# Altium PCB lock_in.PcbDoc
Units mil, origin at the board's own origin, x right, y up, seen from the top; angles counter-clockwise.
Board outline 3533 x 1997 mil, 2 copper layers (Top Layer, Bottom Layer); 71 components, 52 nets, 243 pads, 188 vias.
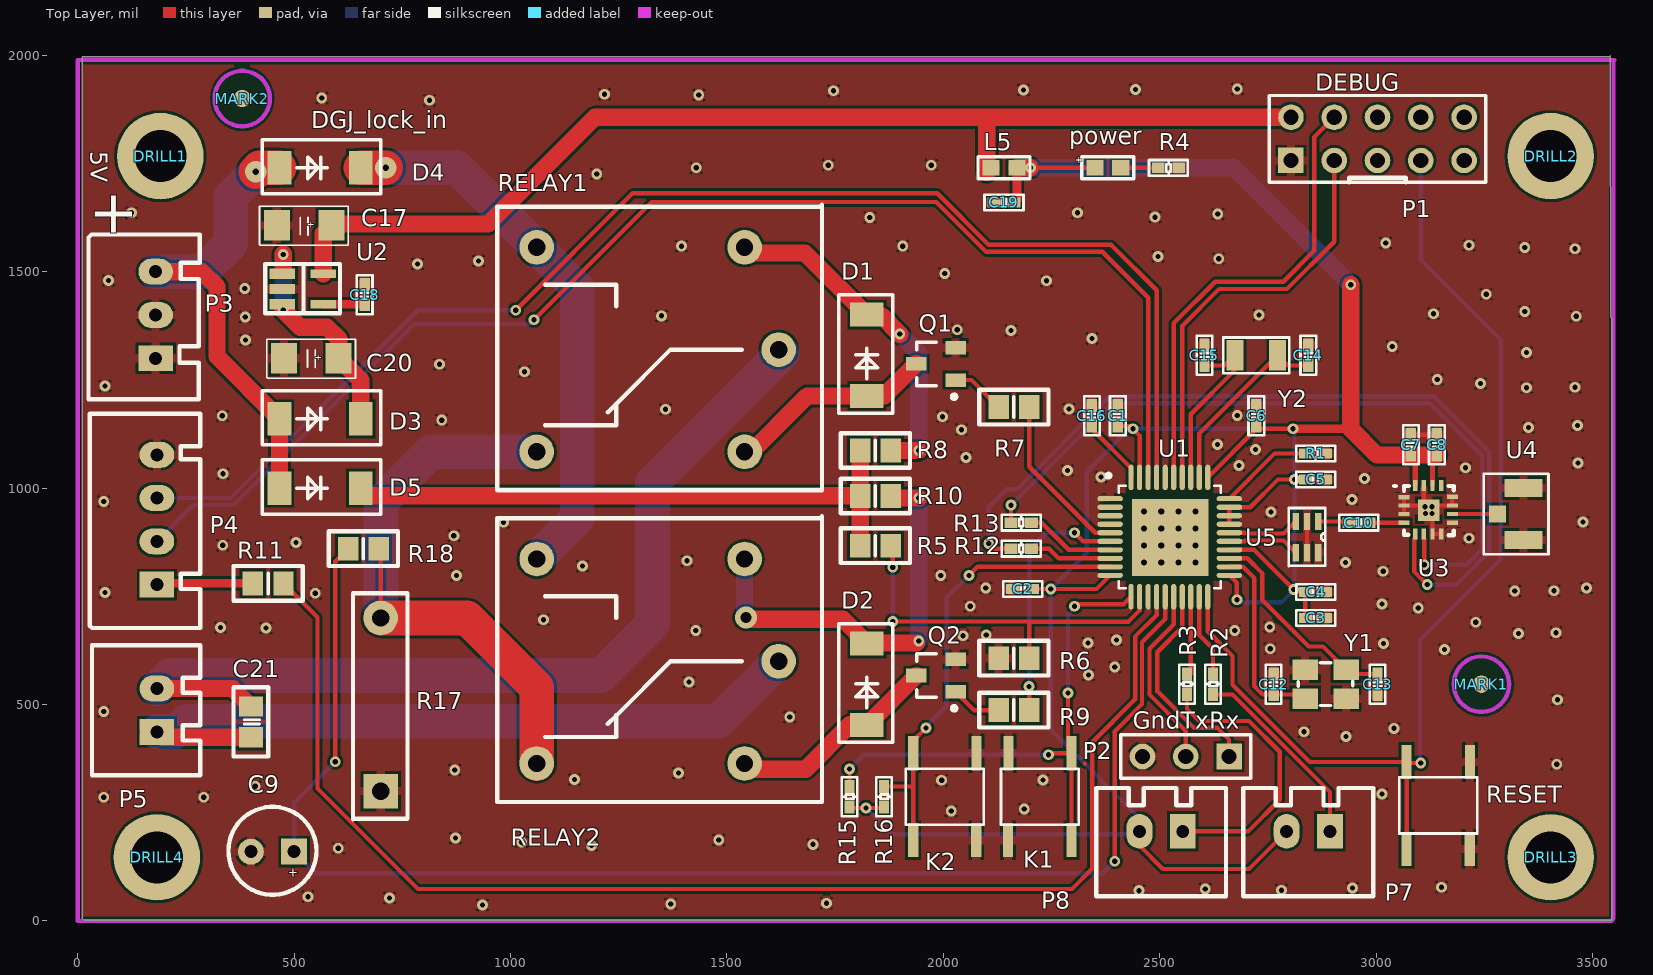
[diagram p0: Top Layer view]
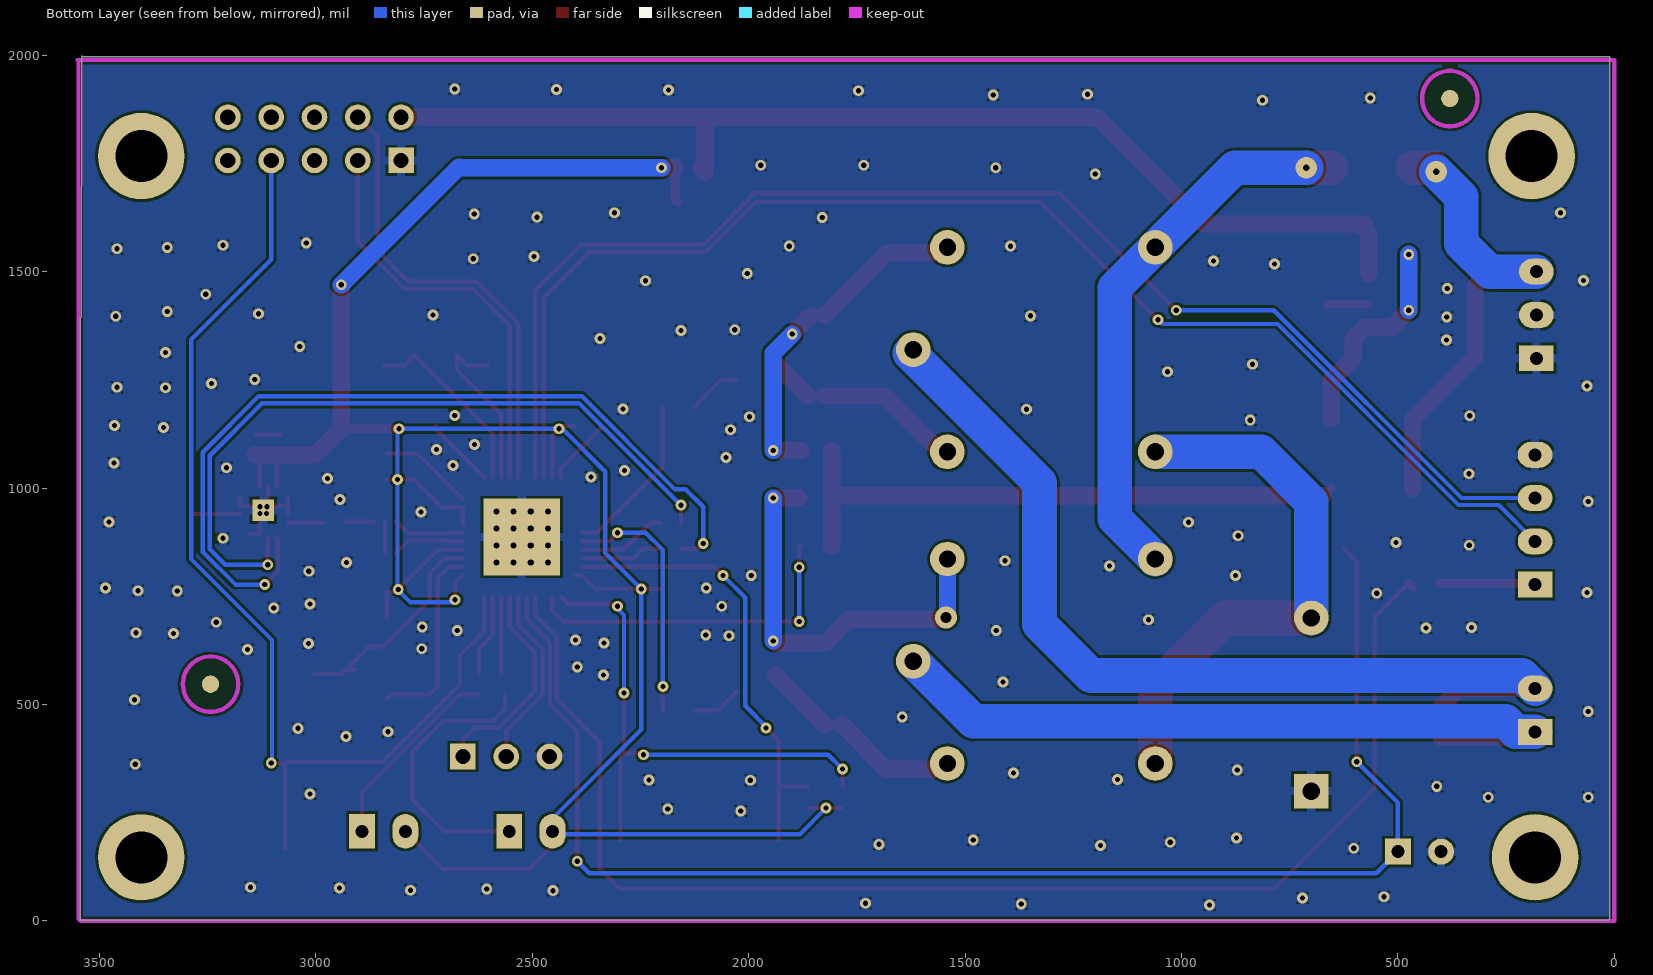
[diagram p1: Bottom Layer view, seen from below]

## Layer stack, top to bottom
Top Layer: signal copper 1.4
Dielectric: dielectric 12.6, FR-4, Dk 4.8
Bottom Layer: signal copper 1.4

## Board outline
3542,1395 3544,1393 3544,2 14,2 11,5 11,1997 3539,1997 3541,1999

## Design rules (kind name [scope] priority, off if disabled: settings)
Clearance [All] p1: gap=6
DiffPairsRouting [All] p1: maxlimit=20 minlimit=6 mostfreqgap=6 maxuncoupledlength=500
MatchedLengths DiffPair_MatchedLengths [InDifferentialPair ('RF1')] p1: tolerance=1000 checknetsindiffpair=TRUE checkdiffpairvsdiffpair=TRUE checkothers=TRUE
PlaneConnect [All] p1: planeconnectstyle=Relief reliefexpansion=20 reliefentries=4 reliefconductorwidth=20 reliefairgap=20
PolygonConnect [All] p1: connectstyle=Relief reliefconductorwidth=20 reliefentries=4 polygonreliefangle="90 Angle"
RoutingVias [All] p1: holewidth=12 width=25 viastyle="Through Hole" minholewidth=12 minwidth=25 maxholewidth=25 maxwidth=50
SilkscreenOverComponentPads [All] p1: minsilkscreentomaskgap=10
SolderMaskExpansion [All] p1: expansion=4
Width DiffPair_Width [InDifferentialPair('RF1')] p1: maxlimit=10 minlimit=10 preferedwidth=10
Width [All] p2: maxlimit=100 minlimit=10 preferedwidth=10
25 further rules are at their usual default settings.

## Classes and differential pairs
component class U_driver: C9 C21 D1 D2 D4 D5 DRILL1 DRILL2 DRILL3 DRILL4 MARK1 MARK2 P3 P4 P5 Q1 Q2 R7 R8 R9 R10 R11 R17 R18 RELAY1 RELAY2
component class U_lock_in: C1 C2 C3 C4 C5 C6 C7 C8 C10 C12 C13 C14 C15 C16 C17 C18 C19 C20 D3 K1 K2 L5 P1 P2 P7 P8 power R1 R2 R3 R4 R5 R6 R12 R13 R15 R16 RESET U1 U2 U3 U4 U5 Y1 Y2
differential pair RF1: +RF1_P -RF1_N

## Components (designator, comment, footprint, x,y, rotation, side; value= is the part's Value field where it differs from the comment)
C1 "0.1uF,0402" C0402 2403,1167 r270 top
C2 "0.1uF,0402" C0402 2183,767 r0 top
C3 "0.1uF,0402" C0402 2860,700 r0 top
C4 "0.1uF,0402" C0402 2860,760 r180 top
C5 "0.1uF,0402" C0402 2860,1020 r180 top
C6 "1uF,0402" C0402 2723,1167 r270 top
C7 "104,0402" C0402 3080,1100 r270 top
C8 "104,0402" C0402 3140,1100 r90 top
C9 "4.7uF" CDIP2 500,160 r180 top
C10 "2.2pf,0402" C0402 2960,920 r0 top
C12 "27pF,0402" C0402 2763,547 r270 top
C13 "27pF,0402" C0402 3003,547 r90 top
C14 "15pF,0402" C0402 2843,1307 r90 top
C15 "15pF,0402" C0402 2603,1307 r90 top
C16 "0.1uF,0402" C0402 2343,1167 r270 top
C17 "47uF" 3216 523,1607 r180 top
C18 "0.1uF,0402" C0402 663,1447 r270 top
C19 "0.1uF,0402" C0402 2140,1660 r0 top
C20 "47uF" 3216 540,1300 r180 top
C21 "0.1uF,0805" C0805 400,460 r90 top
D1 "M1" DO214AC 1823,1307 r90 top
D2 "M1" DO214AC 1823,547 r90 top
D3 "M7" DO214AC 560,1160 r0 top
D4 "M7" DO214AC 560,1740 r0 top
D5 "M7" DO214AC 560,1000 r0 top
DRILL1 "DRILL" DRILL_3MM 191,1767 r90 top
DRILL2 "DRILL" DRILL_3MM 3403,1767 r90 top
DRILL3 "DRILL" DRILL_3MM 3403,147 r90 top
DRILL4 "DRILL" DRILL_3MM 183,147 r90 top
K1 "KEY_SMT_4PIN" KEY-SMT 2223,287 r270 top
K2 "KEY_SMT_4PIN" KEY-SMT 2003,287 r90 top
L5 "1uH,0603" L0603 2140,1740 r0 top
MARK1 "MARK POINT" MARK_POINT 3243,547 r90 top
MARK2 "MARK POINT" MARK_POINT 380,1900 r90 top
P1 "DEBUG" HDR2X5 3003,1807 r90 top
P2 "GndTxRx" HDR1X3 2660,380 r180 top
P3 "5V" HDR3X1 180,1400 r90 top
P4 "itr9608" HDR4X1 183,927 r90 top
P5 "MOTOR" HDR2X1 183,487 r90 top
P7 "Header2X1" HDR2X1 2843,207 r180 top
P8 "Header2X1" HDR2X1 2503,207 r180 top
power "0603_SMT" LED0603 2380,1740 r0 top
Q1 "S8050,SOT-23" SOT23 1983,1287 r90 top
Q2 "S8050,SOT-23" SOT23 1983,567 r90 top
R1 "56k,0402" R0402 2860,1080 r180 top
R2 "1k,0402" R0402 2623,547 r90 top
R3 "1k,0402" R0402 2563,547 r90 top
R4 "1k,0402" R0402 2520,1740 r0 top
R5 "15k,0805" R0805 1843,867 r0 top
R6 "10k,0805" R0805 2163,607 r180 top
R7 "2k,0808" R0805 2163,1187 r0 top
R8 "220,0805" R0805 1843,1087 r180 top
R9 "2k,0808" R0805 2163,487 r180 top
R10 "220,0805" R0805 1843,982 r180 top
R11 "220,,0805" R0805 440,780 r0 top
R12 "1k,0402" R0402 2180,860 r180 top
R13 "1k,0402" R0402 2180,920 r180 top
R15 "22k,0402" R0402 1783,287 r90 top
R16 "22k,0402" R0402 1863,287 r90 top
R17 "10mm*0.02" Ri 700,500 r270 top
R18 "10k,0603" R0805 660,860 r180 top
RELAY1 "5V_RELAY" RELAY_5V_5PIN 1340,1320 r180 top
RELAY2 "5V_RELAY" RELAY_5V_5PIN 1340,600 r180 top
RESET "KEY_SMT_4PIN" KEY-SMT 3143,267 r90 top
U1 "CC2541F256" PQFP40 2523,887 r0 top
U2 "RT9193-33V" SOT-23-5 520,1460 r270 top
U3 "RFX2401C" QFN16 3120,950 r0 top
U4 "ipex" IPEX 3340,1000 r0 top
U5 "2450BM15A002" 2450BM15A002 2840,887 r270 top
Y1 "32.000MHz/SX-32" 1210 2883,547 r0 top
Y2 "32.768kHz" 1206 2723,1307 r0 top

## Footprints (in the part's own frame and the unit in brackets; to place one, negate y for a bottom-side part, rotate by r counter-clockwise, add the part's x,y. Pads: shape width x height; smd on the part's side, far side on the other; paste and mask are expansions set on the pad)
1206 [mm]
  rect 1x1.8 smd: 1(-1.25,0) 2(1.25,0)
  silkscreen extent -1.93,-1.07 1.93,1.04
1210 [mm]
  rect 1.5x1.2 smd: 1(-1.2,-0.85) 2(1.2,-0.85) 3(1.2,0.85) 4(-1.2,0.85)
  silkscreen extent -1.6,-1.25 1.6,1.25
2450BM15A002 [mil]
  rect 40x14 smd: 1(-36,26) 2(-36,0) 3(-36,-26) 4(36,-26) 5(36,0) 6(36,26)
  silkscreen extent -67,-42 67,42
3216 [mil]
  rect 60x70 smd: 1(-63,0) 2(63,0)
  silkscreen extent -102,-44 103,46
C0402 [mm]
  rect 0.75x0.6 smd: 1(-0.6,0) 2(0.6,0)
  silkscreen extent -1.14,-0.46 1.14,0.46
C0805 [mm]
  rect 1.2x1.4 smd: 1(-0.9,0) 2(0.9,0)
  silkscreen extent -2.03,-1.02 2.03,1.02
CDIP2 [mil]
  rect 60x60 hole 30: 1(0,0)
  round 60 hole 30: 2(100,0)
  silkscreen extent -52,-104 152,100
DO214AC [mil]
  rect 55x77 smd: 1(-94,0) 2(94,0)
  silkscreen extent -134,-60 140,65
DRILL_3MM [mil]
  round 200 hole 120: 1(0,0)
HDR1X3 [mm] "Connector; Header; 3 Position"
  rect 1.5x1.5 hole 0.9: 1(0,0)
  round 1.5 hole 0.9: 2(2.54,0) 3(5.08,0)
  silkscreen extent -1.27,-1.27 6.35,1.27
HDR2X1 [mil]
  rect 60x80 hole 30: 1(-50,0)
  oval 60x80 hole 30: 2(50,0)
  silkscreen extent -150,-100 150,150
HDR2X5 [mm]
  rect 1.5x1.5 hole 0.9: 1(-1.27,5.08)
  round 1.5 hole 0.9: 2(1.27,5.08) 3(-1.27,2.54) 4(1.27,2.54) 5(-1.27,0) 6(1.27,0) 7(-1.27,-2.54) 8(1.27,-2.54) 9(-1.27,-5.08) 10(1.27,-5.08)
  silkscreen extent -2.54,-6.35 2.54,6.35
HDR3X1 [mil]
  rect 60x80 hole 30: 1(-100,0)
  oval 60x80 hole 30: 2(0,0) 3(100,0)
  silkscreen extent -195,-102 186,155
HDR4X1 [mil]
  rect 60x80 hole 30: 1(-150,0)
  oval 60x80 hole 30: 2(-50,0) 3(50,0) 4(150,0)
  silkscreen extent -250,-100 245,155
IPEX [mil]
  rect 40x40 smd: 1(-60,-60)
  rect 88x42 smd: 2(0,-120) 3(0,0)
  silkscreen extent -92,-153 58,33
KEY-SMT [mm]
  rect 2x0.6 smd: 1(-2.55,-1.85) 1(2.55,-1.87) 2(-2.55,1.85) 2(2.55,1.85)
  silkscreen extent -1.65,-2.29 1.65,2.29
L0603 [mil]
  rect 40x35 smd: 1(-29.92,0) 2(29.92,0)
  silkscreen extent -60,-26 60,26
LED0603 [mil]
  rect 40x35 smd: 1(-29.92,0) 2(29.92,0)
  silkscreen extent -60,-26 60,26
MARK_POINT [mil]
  round 40 all layers, no hole paste+40 mask+40: 1(0,0)
  Keep-Out Layer circle w10: c0,0 r64.03
PQFP40 [mm]
  oval 1.5x0.3 smd paste+0 mask+0.051: 1(-3.5,2.25) 2(-3.5,1.75) 3(-3.5,1.25) 4(-3.5,0.75) 5(-3.5,0.25) 6(-3.5,-0.25) 7(-3.5,-0.75) 8(-3.5,-1.25) 9(-3.5,-1.75) 10(-3.5,-2.25) 21(3.5,-2.25) 22(3.5,-1.75) 23(3.5,-1.25) 24(3.5,-0.75) 25(3.5,-0.25) 26(3.5,0.25) 27(3.5,0.75) 28(3.5,1.25) 29(3.5,1.75) 30(3.5,2.25)
  oval 0.3x1.5 smd paste+0 mask+0.051: 11(-2.268,-3.5) 12(-1.768,-3.5) 13(-1.268,-3.5) 14(-0.768,-3.5) 15(-0.268,-3.5) 16(0.232,-3.5) 17(0.732,-3.5) 18(1.232,-3.5) 19(1.732,-3.5) 20(2.232,-3.5) 31(2.232,3.5) 32(1.732,3.5) 33(1.232,3.5) 34(0.732,3.5) 35(0.232,3.5) 36(-0.268,3.5) 37(-0.768,3.5) 38(-1.268,3.5) 39(-1.768,3.5) 40(-2.268,3.5)
  rect 0.762x0.762 hole 0.356 paste+0 mask+0: 41(-1.5,-1.5) 41(-1.5,-0.5) 41(-1.5,0.5) 41(-1.5,1.5) 41(-0.5,-1.5) 41(-0.5,-0.508) 41(-0.5,0.5) 41(-0.5,1.5) 41(0.516,-1.5) 41(0.516,-0.508) 41(0.516,0.5) 41(0.516,1.5) 41(1.5,-1.5) 41(1.5,-0.508) 41(1.5,0.5) 41(1.5,1.5)
  rect 4.5x4.5 smd paste+0 mask+0: 41(0.024,-0.024)
  rect 4.496x4.496 smd far side: 41(0.025,0)
  silkscreen extent -3.71,-3 3,3.71
QFN16 [mil]
  rect 26x10 smd: 1(-56,29) 2(-56,10) 3(-56,-10) 4(-56,-30) 9(56,-30) 10(56,-10) 11(56,10) 12(56,30)
  rect 10x26 smd: 5(-30,-56) 6(-10,-56) 7(10,-56) 8(30,-56) 13(30,56) 14(10,56) 15(-10,56) 16(-30,56)
  rect 50x50 all layers, no hole: 17(1,-1)
  silkscreen extent -78,-59 59,55
R0402 [mm]
  rect 0.75x0.6 smd: 1(-0.6,0) 2(0.6,0)
  silkscreen extent -1.14,-0.46 1.14,0.46
R0805 [mm] "Chip Resistor, Body 2.0x1.2mm, IPC Medium Density"
  rect 1.2x1.4 smd: 1(-0.9,0) 2(0.9,0)
  silkscreen extent -2.03,-1.02 2.03,1.02
RELAY_5V_5PIN [mil]
  round 80 hole 40: 1(-279.5,0) 2(279.5,236.2) 3(279.5,-236.2) 4(-200.7,-236.2) 5(-200.7,236.2)
  silkscreen extent -380,-335 371,325
Ri [mil] "res for detect i"
  round 80 hole 40: 1(-200,0)
  rect 80x80 hole 40: 2(200,0)
  silkscreen extent -257,-64 265,62
SOT23 [mm] "SOT-23; 3 Leads; Body 3.0 x 2.3 mm, inc. leads (LxW max)"
  rect 0.8x1.2 smd: 1(-0.95,-1.15) 2(0.95,-1.15) 3(0,1.15)
  silkscreen extent -2.05,-1.19 1.28,1.14
SOT-23-5 [mm]
  rect 0.6x1.5 smd: 1(-0.9,-1.2) 2(0,-1.2)
  rect 0.63x1.5 smd: 3(0.9,-1.2)
  rect 0.5x1.5 smd: 4(0.9,1.2) 5(-0.9,1.2)
  silkscreen extent -1.47,-2.21 1.43,2.18

## Part data
C1 C2 C3 C4 C5 C6 C7 C8 C10 C12 C13 C14 C15 C16 C18 C19 C21: library part CAP, "Capacitor"
C9: library part E_CAP, "electric capacitor"
C17 C20: library part E_CAP, "tantalum capacitor"
D1 D2 D3 D4 D5: library part DIODE, "diode"
K1 K2 RESET: library part KEY, "key"
L5: library part Inductor, "Inductor"
MARK1 MARK2: library part MARK_POINT
P1: library part "Header 5X2", "Header, 5-Pin, Dual row"
P2: library part "Header 3", "Header, 3-Pin"
P3: library part "Header 3X1", "Header 3X1,3-Pin"
P4: library part "Header 4X1", "ITR9608"
P5: library part "Header 2X1"
P7 P8: library part "Header 2X1", "Header,2-Pin"
power: library part LED, "led"
Q1: library part NPN, "transistor"
Q2: library part NPN
R1 R2 R3 R4 R5 R6 R7 R8 R9 R10 R11 R12 R13 R15 R16 R18: library part Res1, "Resistor"
R17: library part Ri
RELAY1 RELAY2: library part RELAY, "relay"
U1: library part CC254x, "TI cc2541F256"
U2: library part RT9193X, "voltage reg"
U4: library part IPEX
Y1: library part CRYSTAL_5, "SPXO"
Y2: library part DA740C, "crystal"

## Via types
v1: diameter 25, hole 12, Top Layer to Bottom Layer, 185 vias
v2: diameter 50, hole 15, Top Layer to Bottom Layer, 2 vias
v3: diameter 50, hole 25, Top Layer to Bottom Layer, 1 vias

## Nets (pads, with @x,y where several pads share a name; then routed paths per layer and width w, separated by ;. In a path a pad name is that pad's centre, name@x,y a point inside that pad or via, vN(x,y) a via of type N, cw(c..) or ccw(c..) an arc to the next point about the centre after c; other vN are vias at no path point)
DC: P1.3 U1.34 | length 969.6
  Top Layer w10: U1.34 2551.81,1374.82 2637,1460 2794,1460 2903,1569 P1.3
DD: P1.4 U1.35 | length 1077.8
  Top Layer w10: U1.35 2532.13,1381.13 2628,1477 2785,1477 2857,1549 2857,1811 P1.4
GND: C1.1 C2.1 C3.2 C4.1 C5.1 C6.1 C7.1 C8.2 C9.2 C12.1 C13.1 C14.2 C15.2 C16.1 C17.2 C18.1 C19.1 C20.2 K1.1 K2.1 P1.1 P2.3 P3.1 P3.2 P4.4 Q1.2 Q2.2 R1.1 R4.2 R6.2 R17.2 RESET.1 U1.1 U1.41 U2.2 U3.1 U3.2 U3.3 U3.7 U3.8 U3.9 U3.11 U3.12 U3.15 U3.17 U4.2 U4.3 U5.2 U5.5 U5.6 Y1.2 Y1.4 | length 410
  Top Layer w10: U5.5 U5.2 ; U3.3 U3.2 ; U3.1 U3.2 ; C7.1 C8.2 ; U3.15 U3.17@3110,960 ; U3.17 v1(3113,957) U3.17@3110,960 ; v1(3129,941) 3130,940 U3.7 U3.8 ; U3.17@3132,960 U3.11 U3.12 ; U3.2 U3.17@3110,960
  other v1: 935,37 1370,39 1730,41 720,53 532,56 2452,70 2781,71 2605,74 2945,76 3151,78 602,168 1187,174 1699,177 1026,182 1481,187 873,192 2018,254 2187,259 60,286 291,286 3013,293 410,311 1996,325 2230,326 1148,327 1388,342 871,349 3417,362 2930,426 2833,437 3041,445 1645,471 60,484 3419,511 1412,552 2335,568 2396,587 3158,627 2755,629 3017,641 2334,642 2400,649 2045,659 2099,661 3329,664 3415,666 1428,671 2673,671 435,677 330,678 2754,679 3230,690 1076,696 3097,723 2062,727 3013,732 549,757 63,759 3320,762 3411,763 2098,769 3486,769 875,798 1994,798 3016,808 1166,820 2929,828 1408,832 335,868 504,874 3214,884 869,890 984,921 3478,922 3114,941 2757,945 3129,957 60,969 2944,974 2973,1022 2364,1026 336,1033 2287,1041 3206,1047 2683,1052 3466,1058 2052,1071 2721,1089 2633,1101 2042,1135 3352,1140 3465,1145 841,1157 1998,1165 334,1167 2679,1168 1358,1182 2290,1183 3347,1232 3459,1233 63,1236 3241,1242 3141,1251 1032,1269 836,1286 3347,1313 3037,1327 388,1342 2343,1346 2156,1364 2032,1366 387,1395 3462,1397 1349,1398 2729,1400 3132,1403 3343,1408 3254,1448 386,1461 2238,1479 71,1480 2003,1496 785,1518 926,1525 2636,1530 2496,1535 3459,1553 3343,1556 1395,1559 1906,1559 3214,1561 3022,1566 1830,1625 2489,1626 2634,1633 124,1636 2310,1636 1199,1726 1429,1740 1734,1746 1972,1746 813,1896 564,1901 1435,1908 1217,1910 1746,1918 2185,1920 2444,1921 2679,1922
I_DETECT: R17.1 R18.1 RELAY1.2 RELAY2.2 | length 1441
  Top Layer w10: R18.1 700,855.43 R17.1
  Top Layer w80: R17.1 900,700 1060.5,539.5 RELAY2.2
  Bottom Layer w80: R17.1 700,968 815.8,1083.8 RELAY1.2
KEY1: K1.2 R15.2 U1.11 | length 1265.1
  Top Layer w10: R15.2 v1(1783,351) ; v1(2243,384) 2246.39,387.39 K1.2@2295.83,387.39 ; v1(2288,527) 2288,395.23 K1.2@2295.83,387.39 ; K1.2@2295.83,186.61 K1.2@2295.83,387.39 ; v1(2303,727) 2303,722 2313,732 2416.5,732 U1.11
  Bottom Layer w10: v1(1783,351) 1816,384 v1(2243,384) ; v1(2288,527) 2288,707 2303,722 v1(2303,727)
KEY2: K2.2 R16.2 U1.9 | length 1070.1
  Top Layer w10: R16.2 1929.54,310.62 ; K2.2@1930.17,186.61 1930.17,387.39 1930.17,416.17 v1(1960,446) ; v1(2058.96,797.96) 2079.1,818.1 U1.9
  Bottom Layer w10: v1(1960,446) 1957,446 2008,497 2008,747 v1(2058.96,797.96)
LED1: R2.2 U1.19 | length 191.8
  Top Layer w10: U1.19 2591.19,660.81 2623,629 R2.2
LED2: R3.2 U1.18 | length 178.6
  Top Layer w10: R3.2@2571.5,570.62 U1.18
MOTOR_A: C21.1 P5.1 RELAY2.1 | length 1733.9
  Top Layer w40: P5.1@188.43,431.57 P5.1 195.43,424.57 C21.1
  Bottom Layer w80: P5.1 227,437 251,461 1325,461 1480.5,461 RELAY2.1
MOTOR_B: C21.2 P5.2 RELAY1.1 | length 2190.6
  Top Layer w40: P5.2 358.43,537 C21.2
  Bottom Layer w80: P5.2 213,567 1209,567 1328,686 1328,1012.5 RELAY1.1@1627.25,1311.75
NetC9_1: C9.1 R18.2 U1.15 | length 3339.3
  Top Layer w10: v1(595,368) 595,830.43 R18.2 ; v1(2396,138) 2396,438 2459,501 2459,644 2512.44,697.44 U1.15
  Bottom Layer w10: v1(595,368) 500,273 C9.1 550,110 2368,110 v1(2396,138)
NetC10_1: C10.1 U5.1 | length 67.4
  Top Layer w10: U5.1 C10.1@2933.38,923
NetC10_2: C10.2 U3.4 | length 80.4
  Top Layer w10: C10.2 U3.4
NetC12_2: C12.2 U1.22 Y1.1 | length 447
  Top Layer w10: U1.22 2691.9,818.1 2718,792 2718,543 2737.62,523.38 2825.91,523.38 Y1.1
NetC13_2: C13.2 U1.23 Y1.3 | length 509.2
  Top Layer w10: U1.23 2702.21,837.79 2737,803 2737,741 2844,634 2876.71,634 Y1.3 ; Y1.3@2910.24,580.46 Y1.3 ; C13.2 2940.09,570.62 Y1.3
NetC14_1: C14.1 U1.32 Y2.2 | length 437.8
  Top Layer w10: U1.32 2591.19,1125.97 Y2.2 2795.83,1283.38 C14.1
NetC15_1: C15.1 U1.33 Y2.1 | length 405.1
  Top Layer w10: U1.33 2571.5,1170.5 2673.79,1272.79 Y2.1 2650.17,1283.38 C15.1
NetC16_2: C16.2 U1.40 | length 156.8
  Top Layer w10: C16.2@2338,1142 2433.7,1046.3 U1.40
NetC18_2: C18.2 U2.4 | length 96.2
  Top Layer w20: U2.4 661.81,1424.57 C18.2
NetD1_1: D1.1 Q1.3 RELAY1.5 | length 483.6
  Top Layer w20: D1.1 1863.72,1213
  Top Layer w40: RELAY1.5@1543.7,1070.8 1685.9,1213 D1.1 ; 1863.72,1213 Q1.3
NetD1_2: D1.2 R8.1 RELAY1.4 | length 784.6
  Top Layer w20: D1.2@1824,1399 D1.2@1856,1399
  Top Layer w40: RELAY1.4@1543.7,1543.2 1679.8,1543.2 D1.2@1824,1399 ; D1.2@1856,1399 v1(1899.2,1355.8) ; R8.1 v1(1943,1087)
  Bottom Layer w40: v1(1899.2,1355.8) 1943,1312 v1(1943,1087)
NetD2_1: D2.1 Q2.3 RELAY2.5 | length 483.6
  Top Layer w10: D2.1 D2.1@1823.72,453
  Top Layer w20: 1784,453 D2.1
  Top Layer w40: RELAY2.5@1543.7,350.8 1681.8,350.8 1784,453 ; D2.1@1823.72,453 Q2.3
NetD2_2: D2.2 R10.1 RELAY2.4 | length 958.7
  Top Layer w20: v3(1544,701) v3@1548,697 ; R10.1 R10.1@1883.43,977 ; v1@1938,642 v1(1943,647)
  Top Layer w40: v3@1548,697 1768,697 1823,642 v1@1938,642 ; R10.1@1883.43,977 v1(1943,977)
  Bottom Layer w20: v3@1540.7,704.3 v3(1544,701)
  Bottom Layer w40: v3@1540.7,704.3 RELAY2.4 ; v1(1943,647) v1(1943,977)
NetD3_1: D3.1 D4.1 D5.1 P3.3 | length 1129.8
  Top Layer w40: P3.3 287,1500 322,1465 322,1304 D3.1 D5.1
  Top Layer w80: v2(411,1731) 420,1740 D4.1
  Bottom Layer w80: P3.3 288,1500 353.25,1565.25 353.25,1673.25 v2(411,1731)
NetP4_1: P4.1 R11.1 | length 232.7
  Top Layer w10: P4.1 186,780 P4.1@193,787
  Top Layer w20: P4.1@186,780 R11.1
NetP4_2: P4.2 U1.38 | length 3121.5
  Top Layer w10: v1(1054,1389) 1326,1661 1983.37,1661 2098.37,1546 2367,1546 2473.07,1439.93 U1.38
  Bottom Layer w10: P4.2 267,961 359.63,961 777.63,1379 1044,1379 v1(1054,1389)
NetP4_3: P4.3 U1.37 | length 3126.5
  Top Layer w10: v1(1012,1411) 1282,1681 1986,1681 2105,1562 2388,1562 2492.76,1457.24 U1.37
  Bottom Layer w10: P4.3 353,977 787,1411 v1(1012,1411)
NetP7_1: P7.1 R2.1 | length 454.4
  Top Layer w10: R2.1 2667.62,523.38 2893,298 P7.1
NetP8_1: P8.1 R3.1 | length 653.6
  Top Layer w10: P8.1 2704,207 2777,280 2777,391 2706,462 2591,462 2563,490 R3.1
Netpower_2: power.2 R4.1 | length 86.5
  Top Layer w10: power.2 R4.1
NetQ1_2: Q1.1 R7.1 | length 128.9
  Top Layer w10: Q1.1@2030.87,1247 Q1.1 2064.97,1249.6 R7.1
NetQ2_2: Q2.1 R9.2 | length 116.9
  Top Layer w10: Q2.1 2070.87,487 R9.2
NetR1_2: R1.2 U1.30 | length 218.8
  Top Layer w10: U1.30 2765.21,1080 R1.2
NetR7_2: R7.2 U1.5 | length 387.2
  Top Layer w10: R7.2 2198.43,1049.57 2351,897 U1.5@2385.05,897
NetR9_1: R9.1 U1.6 | length 582.4
  Top Layer w10: v1(2198,542) 2198.43,541.57 R9.1 ; v1(2303,897) 2322.84,877.16 U1.6
  Bottom Layer w10: v1@2198.43,542 2198.43,701.57 2198,702 2198,857 2238,897 v1(2303,897)
NetR11_2: R11.2 U1.14 | length 3116.3
  Top Layer w10: R11.2 554,701.43 554,306 786,74 2297,74 2344,121 2344,413 2443,512 2443,657 2492.76,706.76 U1.14
  Top Layer w20: R11.2@465.28,769.84 R11.2
NetR12_1: R12.1 U1.8 | length 190.8
  Top Layer w10: R12.1 2244,860 2266.21,837.79 U1.8
NetR12_2: R12.2 U3.5 | length 1981.9
  Top Layer w10: v1(2105,872) 2117,860 R12.2 ; U3.5@3090,884 3087.5,881.5 3087.5,807.5 v1(3118,777)
  Bottom Layer w10: v1(2105,872) 2105,957 2145,997 2170.13,997 2385.13,1212 3132,1212 3261,1083 3261,852.37 3185.63,777 v1(3118,777)
NetR13_1: R13.1 U1.7 | length 207.5
  Top Layer w10: R13.1 2227,920 2289.53,857.47 U1.7
NetR13_2: R13.2 U3.6 | length 1703.2
  Top Layer w10: R13.2 v1(2156.38,960.62) ; U3.6@3110,884 3111,883 v1(3111,823)
  Bottom Layer w10: v1(2156.38,960.62) 2391.76,1196 3124,1196 3245,1075 3245,859 3209,823 v1(3111,823)
NetU3_10: U3.10 U4.1 | length 104
  Top Layer w10: U3.10 U4.1
POWER_MOTOR: D4.2 RELAY1.3 RELAY2.3 | length 1280.1
  Top Layer w80: D4.2 v2(712,1740)
  Bottom Layer w80: v2(712,1740) 876.7,1740 RELAY1.3 1154,1462.7 1154,929.7 RELAY2.3
RESET: P1.7 RESET.2 U1.20 | length 2484.8
  Top Layer w10: U1.20 2610.87,669.13 2668,612 2668,545.63 2846.23,367.39 RESET.2@3070.17,367.39 ; RESET.2@3070.17,166.61 RESET.2@3070.17,367.39 ; v1(3103,365) 3072.56,365 RESET.2@3070.17,367.39
  Bottom Layer w10: v1(3103,365) 3101,367 3101,649 3288,836 3288,1343 3103,1528 P1.7
RF1_N: U1.26 U5.3 | length 165.6
  Top Layer w10: U1.26 2696,896.84 2697.84,895 2786,895 U5.3
RF1_P: U1.25 U5.4 | length 165.6
  Top Layer w10: U1.25 2696,877.16 2697.84,879 2786,879 U5.4
RX: P2.1 U1.17 | length 493.5
  Top Layer w10: U1.17 2551.81,678.82 2494,621 2494,531 2579,446 2633,446 2660,419 P2.1
TX: P2.2 U1.16 | length 427.2
  Top Layer w10: U1.16 2532.13,685.13 2476,629 2476,523 2560,439 P2.2
VCC5V_A: C20.1 D3.2 U2.1 U2.3 | length 527.4
  Top Layer w40: v1(475,1411) 514,1372 576,1372 603,1345 C20.1 654,1249 D3.2 ; U2.1@475,1503.06 v1(475,1540)
  Bottom Layer w40: v1(475,1411) 475,1535 v1(475,1540)
VCC5V_A1: D5.2 R5.1 R8.2 R10.2 | length 1356
  Top Layer w20: D5.2 D5.2@655,999
  Top Layer w40: D5.2@673,982 R10.2 ; R5.1 R10.2 ; R8.2 R10.2
VCC33V_A: C17.1 L5.1 P1.2 U2.5 | length 2588
  Top Layer w40: U2.5 567.24,1588.24 C17.1 ; C17.1@578,1610 948,1610 1195,1857 P1.2 ; 2100,1857 2100,1729.92 L5.1
VCC33V_D: C1.2 C2.2 C3.1 C4.2 C5.2 C6.2 C7.2 C8.1 C19.2 L5.2 P7.2 P8.2 power.1 R15.1 R16.1 U1.10 U1.21 U1.24 U1.27 U1.28 U1.29 U1.31 U1.39 U3.14 U3.16 | length 6286.9
  Top Layer w10: R15.1@1785.38,261 v1(1821,261) R16.1@1860.62,261 ; v1(2201,1740) power.1 ; C2.2 v1(2248,767) 2353.79,767 2384.79,798 U1.10@2399,798 ; C1.2 v1@2431.62,1143.38 ; v1(2438,1137) 2453.39,1121.61 U1.39 ; P8.2 2453,174 2507,120 2706,120 P7.2 ; U1.31 2723,1136.93 C6.2 ; U1.21 2678,781.21 v1(2678,742) ; U1.24 2717.53,857.47 v1(2809.29,765.71) 2815,760 C4.2 C3.1 ; U1.27 U1.28 U1.29 2708.9,955.9 2773,1020 C5.2 ; C6.2@2729.38,1137 v1(2808,1137) ; C7.2 C7.2@3090,1066.38 ; C8.1@3130,1066.38 C8.1
  Top Layer w12: U3.16 C7.2@3090,1066.38 ; U3.14 C8.1@3130,1066.38
  Top Layer w20: C19.2 2169.92,1666.3 L5.2 ; v1(2808,1137) 2941,1137
  Top Layer w40: L5.2 v1(2201,1740) ; v1(2941,1470) 2941,1137 3001.62,1076.38 C7.2 C8.1
  Bottom Layer w10: v1(1821,261) 1882,200 2446,200 P8.2 2453,237 2248,442 v1(2248,767) 2331,850 2331,1038 2430,1137 v1(2438,1137) v1(2808,1137) 2811,1134 v1(2811,1020) 2811,766 2781,736 2684,736 v1(2678,742)
  Bottom Layer w40: v1(2201,1740) 2669,1740 2670,1741 v1(2941,1470)
VMONITOR: R5.2 R6.1 U1.12 | length 873.9
  Top Layer w10: R5.2 1883,862.43 v1(1883,817) ; v1(1883,692) 2198,692 ; R6.1 2198.43,691.57 2427.57,691.57 2453.39,717.39 U1.12
  Bottom Layer w10: v1(1883,692) v1(1883,817)
pads on no net: DRILL1.1 DRILL2.1 DRILL3.1 DRILL4.1 MARK1.1 MARK2.1 P1.5 P1.6 P1.8 P1.9 P1.10 U1.2 U1.3 U1.4 U1.13 U1.36 U3.13
copper on no net: | length 0.7
  Top Layer w10: 2326.47,363.59 2327,363.06

## Polygon pours and split planes (outlines as drawn)
GND on Top Layer "Top Layer-No Net" (solid, remove dead copper): 14,1989 0,1975 0,0 3543,0 3548,5 3537,16 3537,1989
GND on Bottom Layer "Top Layer-No Net" (solid, remove dead copper): 9,1989 9,9 0,0 5,5 3548,5 3548,1987

## Keep-outs
Keep-Out Layer:
  lines w10: 0,0 0,1989 3550,1989 3548,1987 3548,5 3543,0 3534,0 0,0

## Silkscreen, mask and mechanical layers (free items; w line width, h text height)
Top Overlay:
  text "DGJ_lock_in" at 539,1831 h40
  text "+" at 25,1590 h100
Mechanical 1:
  lines w10: 10,1 10,1989 3539,1989 3539,2 3540,1 10,1

## Text inside footprints (layer, text, board x,y; h text height)
C9: Top Overlay "+" at 510,121 h20 r180
C17: Top Overlay "+" at 548,1615 h15 r180
C20: Top Overlay "+" at 565,1308 h15 r180
power: Top Overlay "+" at 2305,1750 h15